# Altium PCB M8030-2.PcbDoc
Units mm, origin at the board's own origin, x right, y up, seen from the top; angles counter-clockwise.
Board outline 35.05 x 35.05 mm, 4 copper layers (Top Layer, GND, Signal, Bottom Layer), stack 0.778 mm thick; 49 components, 40 nets, 167 pads, 306 vias.
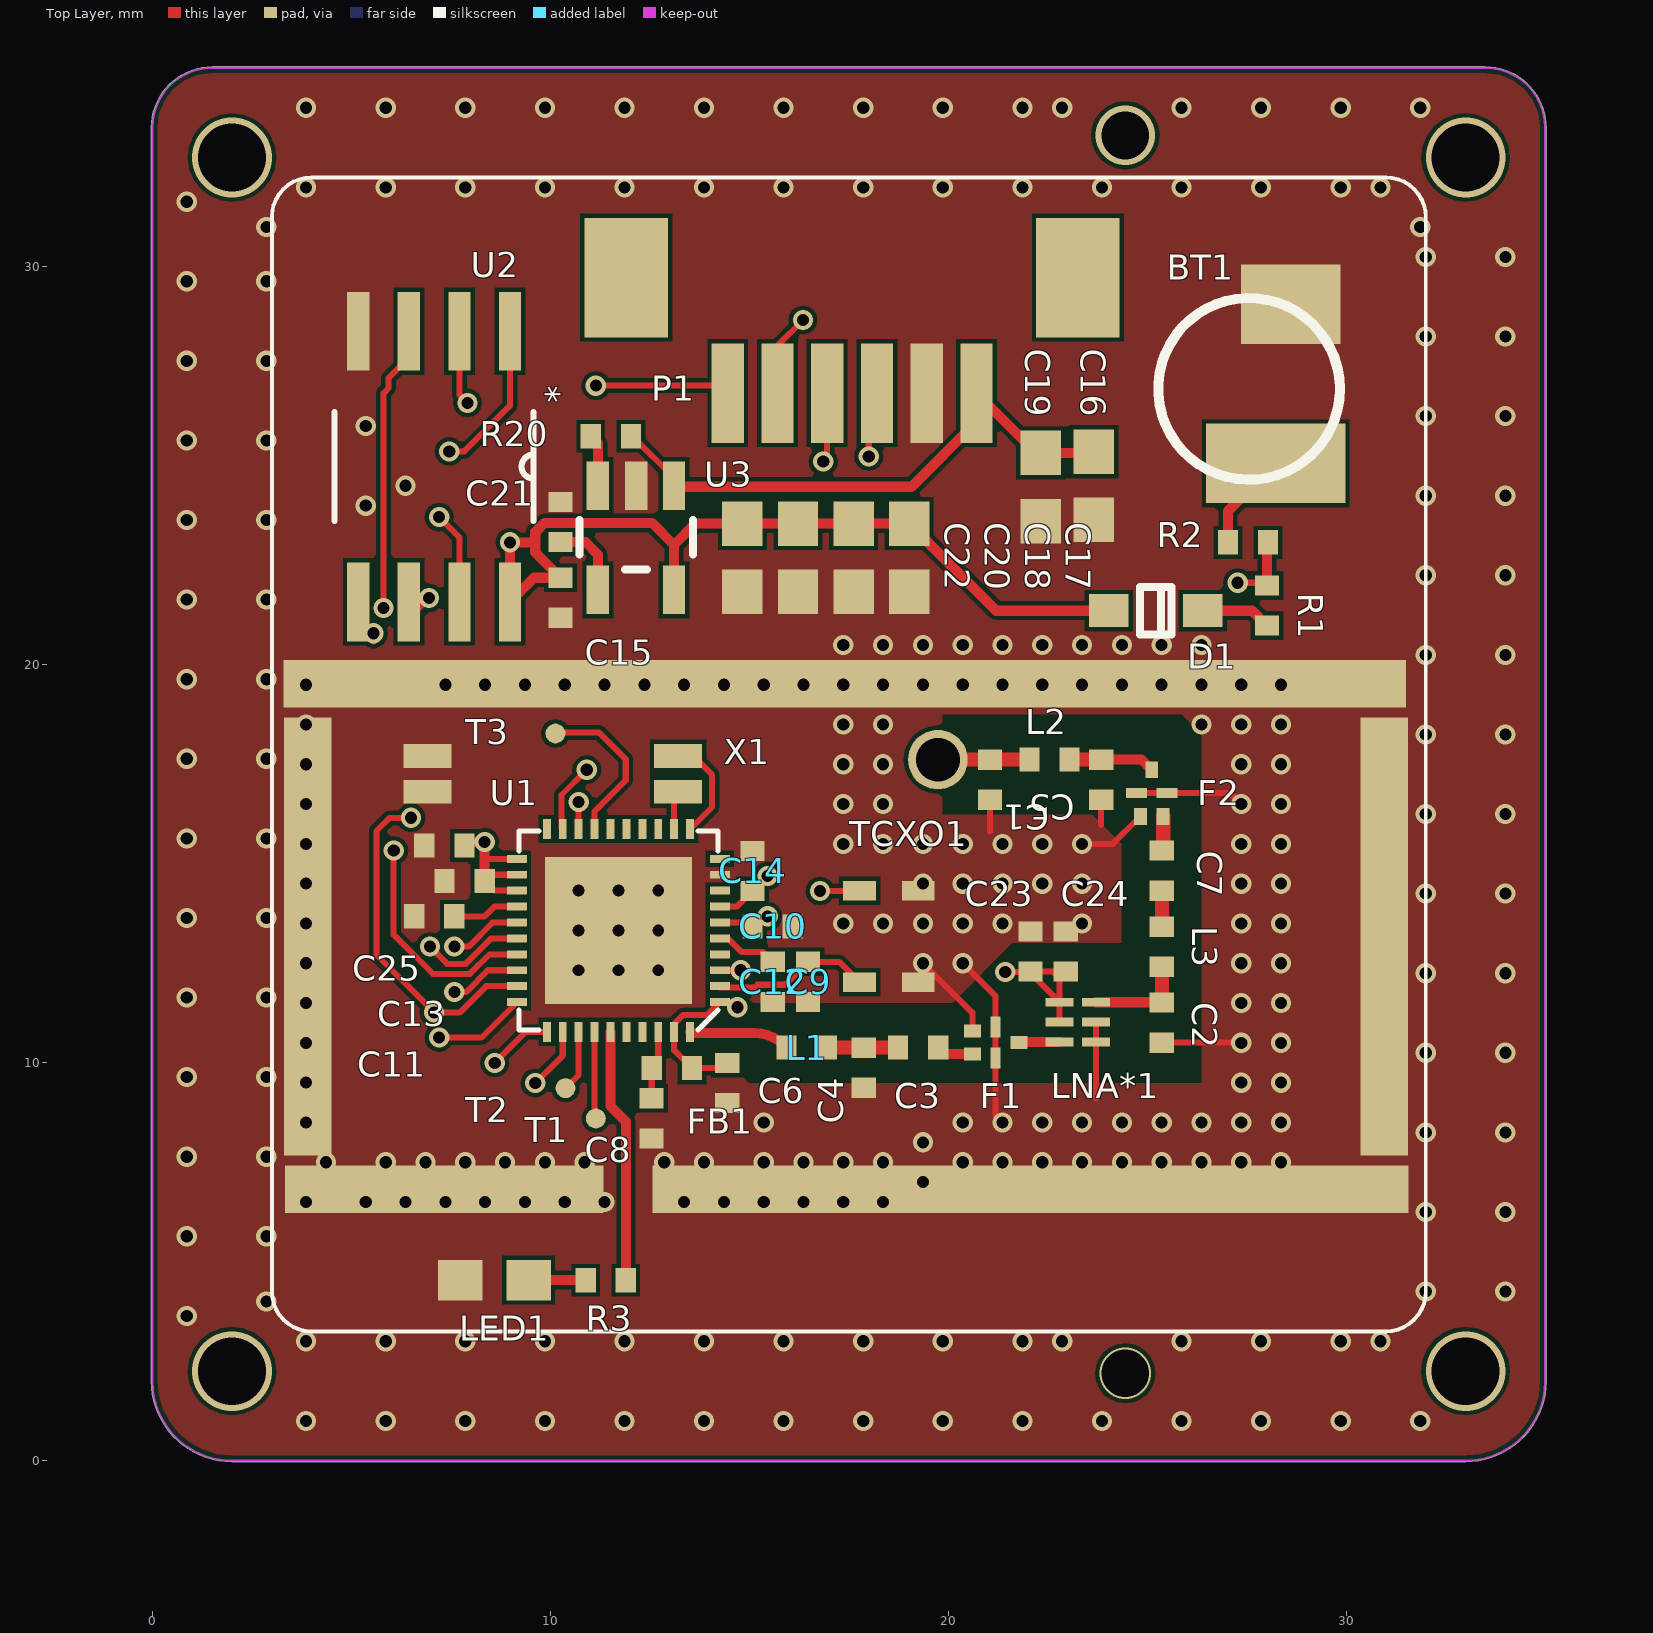
[diagram p0: Top Layer view]
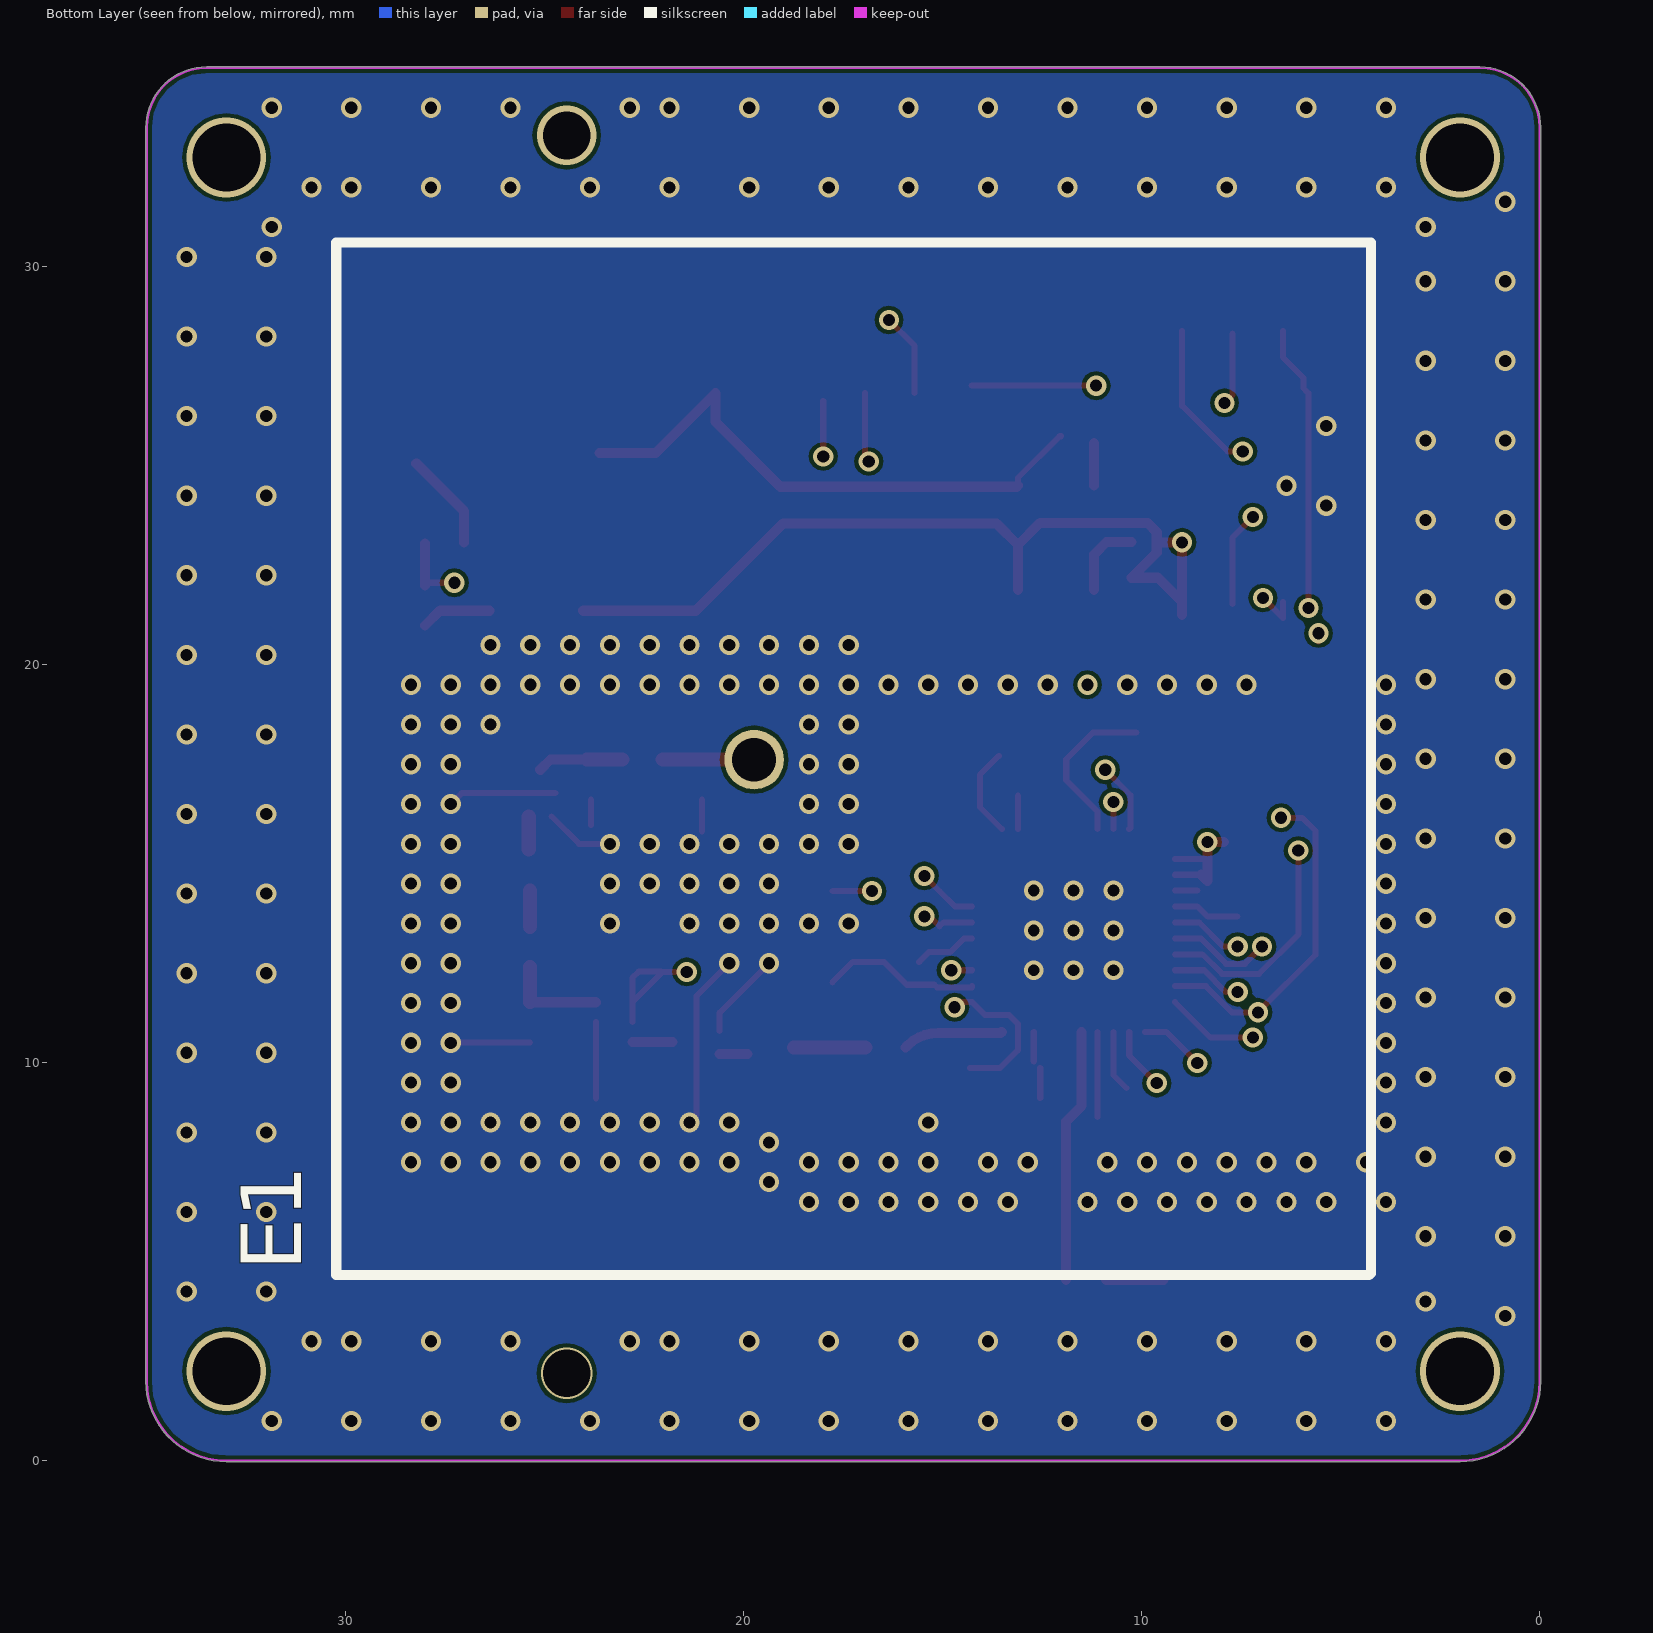
[diagram p1: Bottom Layer view, seen from below]
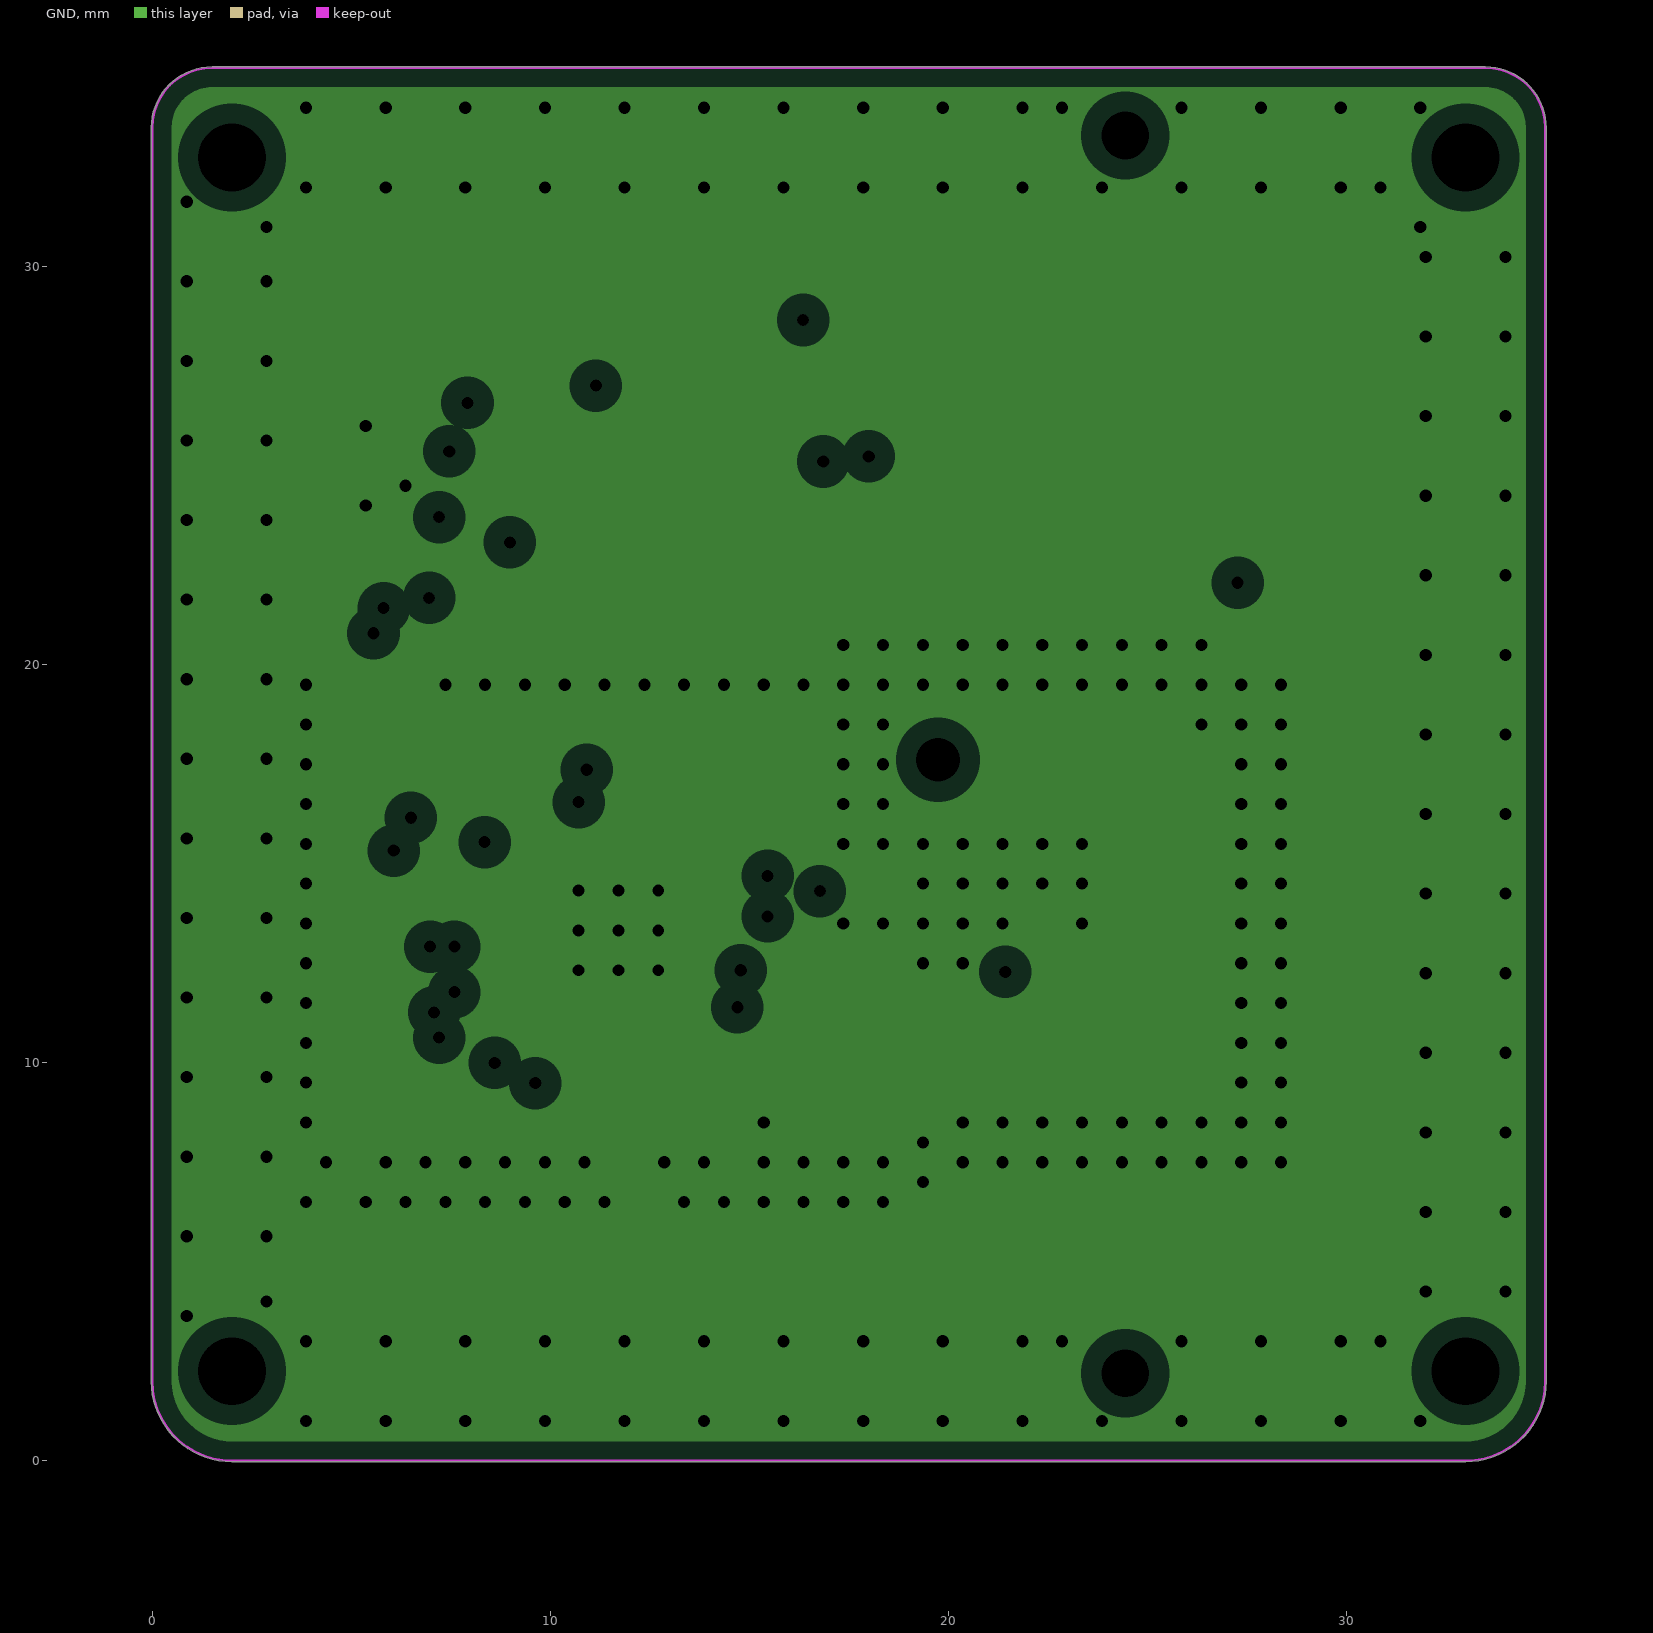
[diagram p2: GND, clearances drawn from the general rule]
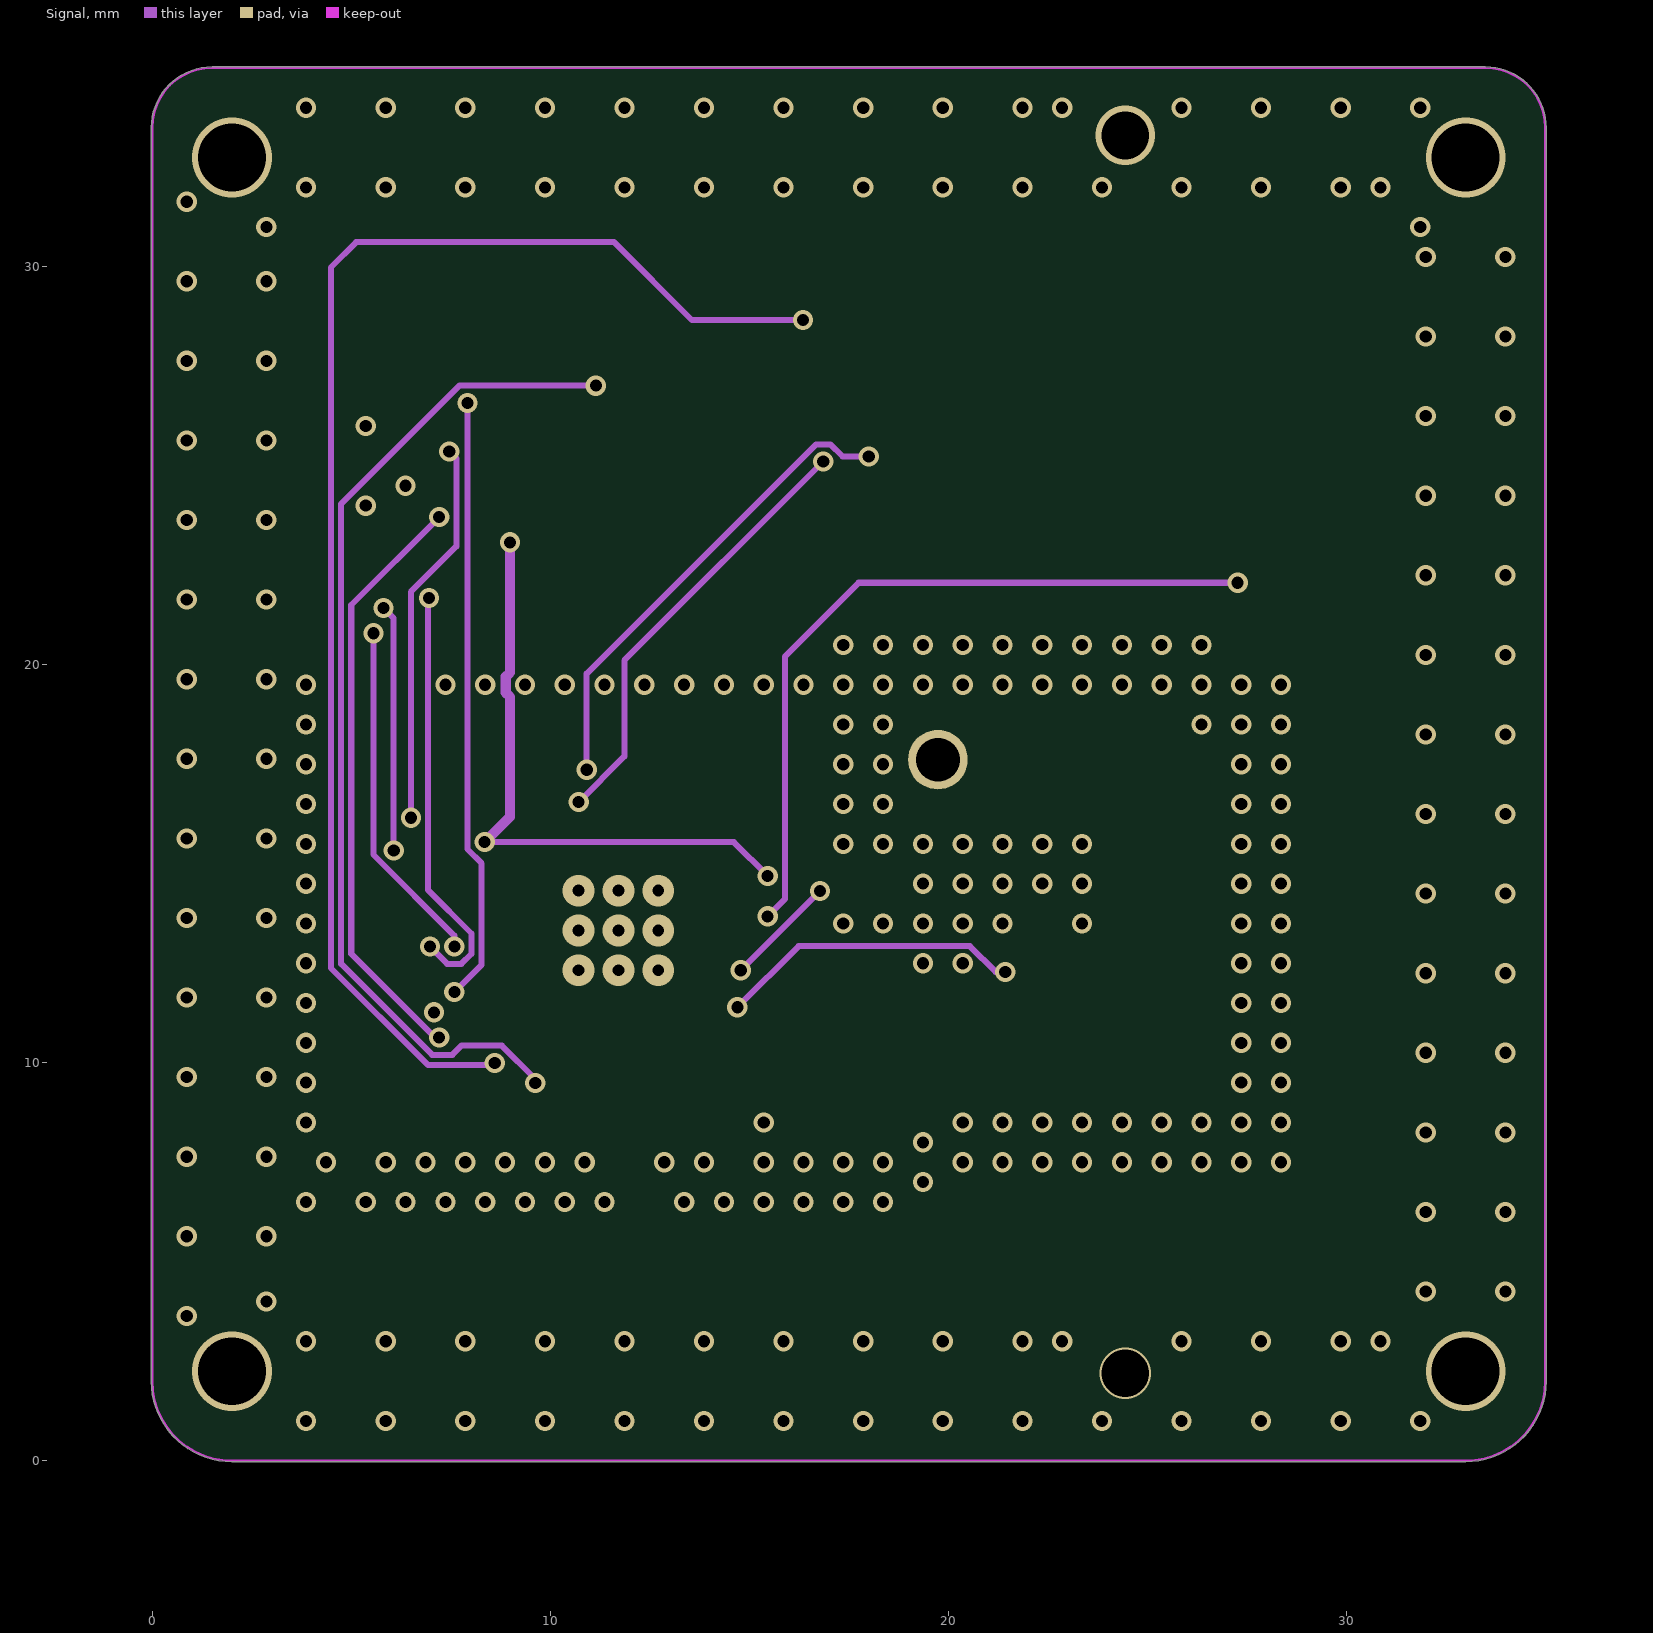
[diagram p3: Signal]

## Layer stack, top to bottom
Top Solder: solder mask 0.0102, Solder Resist, Dk 3.5
Top Layer: signal copper 0.0356
Dielectric 1: core 0.254, FR-4, Dk 4.2
GND: plane copper 0.036, net GND
Dielectric 3: prepreg 0.127, Dk 4.2
Signal: signal copper 0.036
Dielectric 2: core 0.254, Dk 4.2
Bottom Layer: signal copper 0.0356
Bottom Solder: solder mask 0.0102, Solder Resist, Dk 3.5

## Board outline
-0.025,2 -0.025,33.5 cw(c0,33.5) -0.025,33.5 cw(c1.5,33.5) 1.5,35.025 33.5,35.025 cw(c33.5,33.5) 35.025,33.5 cw(c35,33.5) 35.025,33.5 35.025,2 cw(c33,2) 33,-0.025 2,-0.025 cw(c2,2)

## Design rules (kind name [scope] priority, off if disabled: settings)
Clearance [All] p1: gap=0.102
MinimumSolderMaskSliver [All] p1 off: minsoldermaskwidth=0.254
PlaneClearance [All] p1: clearance=0.508
PlaneConnect [All] p1: planeconnectstyle=Direct reliefexpansion=0.508 reliefentries=4 reliefconductorwidth=0.254 reliefairgap=0.254
PolygonConnect [All] p1: connectstyle=Direct reliefconductorwidth=0.254 reliefentries=4 polygonreliefangle="90 Angle" airgapwidth=0.254
RoomDefinition M8030 [InComponentClass('M8030')] p1 off: confinementstyle=ConfineIn formatcopy=TRUE lockcomponents=FALSE outline 135.194,-9.746 141.29,-9.746 141.29,-1.11 135.194,-1.11
RoutingVias [All] p1: holewidth=0.305 width=0.508 viastyle="Through Hole" minholewidth=0.305 minwidth=0.508 maxholewidth=0.711 maxwidth=1.27
SilkToSilkClearance [All] p1 off: silktosilkclearance=0.254
SilkToSolderMaskClearance [IsPad] p1 off: minsilkscreentomaskgap=0.254 clearancetoexposedcopper=TRUE
SolderMaskExpansion [All] p1: expansion=0.102
UnpouredPolygon [All] p1: allowunpoured=FALSE
Width [All] p1: maxlimit=0.508 minlimit=0.102 preferedwidth=0.152
24 further rules are at their usual default settings.

## Components (designator, comment, footprint, x,y, rotation, side; value= is the part's Value field where it differs from the comment)
BT1 "Battery" XH414H-IV01E 27.56,26.935 r180 top
C1 "NC" 0402 21.05,17.109 r90 top
C2 "NC" 0402 25.368,11.013 r270 top
C3 "47pF" 0402 19.239,10.382 r0 top
C4 "2.7pF" 0402 17.875,9.87 r90 top
C5 "NC" 0402 23.844,17.109 r90 top
C6 "1uF" 0402 14.446,9.489 r90 top
C7 "470pF" 0402 25.368,14.823 r90 top
C8 "1uF" 0402 12.541,8.6 r90 top
C9 "1uF" 0402 16.478,12.029 r90 top
C10 "1uF" 0402 15.589,13.426 r180 top
C11 "1uF" 0402 7.08,13.68 r0 top
C12 "2.2uF" 0402 15.589,12.029 r90 top
C13 "4.7uF" 0402 7.842,14.569 r0 top
C14 "1uF" 0402 15.081,14.823 r270 top
C15 "1uF" 0402 10.255,21.681 r90 top
C16 "4.7uF" 0603 23.659,24.504 r270 top
C17 "4.7uF" 0603 19.018,22.697 r270 top
C18 "4.7uF" 0603 17.621,22.697 r270 top
C19 "0.1uF" 0603 22.32,24.475 r270 top
C20 "4.7uF" 0603 16.224,22.697 r270 top
C21 "0.1uf" 0402 10.255,23.586 r90 top
C22 "0.1uF" 0603 14.827,22.697 r270 top
C23 "33nF" 0402 22.066,12.791 r90 top
C24 "47pF" 0402 22.955,12.791 r90 top
C25 "4.7uF" 0402 7.334,15.458 r0 top
D1 "Diode" LC-SOD-323 25.216,21.36 r180 top
E1 "Antenna" "passive25x25 - 3D" 17.24,17.617 r90 bottom
F1 "SAW-SAFEB" SAFEB1G57KE0 21.779,10.509 r0 top
F2 "SAW-SAFEB" SAFEB1G57KE0 25.114,17.363 r90 top
FB1 "BLM15HD102SN1" 0402 13.049,9.87 r0 top
L1 "6.8nH" 0402 16.445,10.382 r180 top
L2 "0R" 0402 22.541,17.621 r0 top
L3 "6.8nH" 0402 25.368,12.918 r270 top
LED1 "LED0" 0603 8.604,4.536 r180 top
LNA*1 "MAX2659" MAX2659 23.717,11.521 r180 top
P1 "Usart Interface" WFRSM125 16.957,26.83 r180 top
R1 "" 0402 28.01,21.487 r90 top
R2 "" 0402 27.527,23.078 r0 top
R3 "" 0402 11.398,4.536 r180 top
R20 "10k" 0402 11.525,25.745 r180 top
T1 "TestPad" "TestPad - 0.5mm" 11.144,8.6 r270 top
T2 "TestPad" "TestPad - 0.5mm" 10.382,9.362 r0 top
T3 "TestPad" "TestPad - 0.5mm" 10.128,18.274 r0 top
TCXO1 "26M 0.5ppm" 2520_TCXO 18.51,13.172 r90 top
U1 "UBX-M8030-KT_1" UBX-M8030-KT 11.712,13.324 r180 top
U2 "SQI_FLash" SO8-208mil 7.08,24.983 r270 top
U3 "RT9193-33GB" SOT23-5 12.16,23.205 r180 top
X1 "32.768k, 6-12pF" MC-146 10.061,17.261 r180 top

## Footprints (in the part's own frame and the unit in brackets; to place one, negate y for a bottom-side part, rotate by r counter-clockwise, add the part's x,y. Pads: shape width x height; smd on the part's side, far side on the other; paste and mask are expansions set on the pad)
0402 [mil] "0402-RES"
  rect 20x24 smd: 1(-19.69,0) 2(20,0)
0603 [mil] "0603-RES"
  rect 44x40 smd: 1(-33.46,0) 2(34,0)
2520_TCXO [mm]
  rect 0.5x0.825 smd: 1(-1.15,-0.737) 2(1.15,-0.737) 3(1.15,0.737) 4(-1.15,0.737)
LC-SOD-323 [mm]
  rect 1x0.83 smd: 1(1.18,0) 2(-1.18,0)
  silkscreen extent -0.4,-0.6 0.4,0.6, body extent -1.35,-0.62 1.35,0.63, height 1.1
MAX2659 [mm]
  rect 0.7x0.22 smd: 1(0,1) 2(0,0.5) 3(0,0) 4(0.92,0) 5(0.92,0.5) 6(0.92,1)
  body extent -0.03,-0.23 0.97,1.22, height 0.72
MC-146 [mm]
  rect 1.2x0.6 smd: 1(-3.15,0.45) 2(3.15,0.45) 3(-3.15,-0.45) 4(3.15,-0.45)
"passive25x25 - 3D" [mm]
  round 1.5 hole 1.1: 1(0,2.5)
  silkscreen extent -12.95,-13 13,13, body extent -12.42,-12.55 12.68,12.55, height 2.5
SAFEB1G57KE0 [mm]
  rect 0.425x0.325 smd: 1(0,0) 3(-1.175,-0.288) 4(-1.175,0.288)
  rect 0.25x0.525 smd: 2(-0.587,-0.387) 5(-0.587,0.387)
  body extent -1.27,-0.56 0.08,0.53, height 0.6
SO8-208mil [mil]
  rect 78x22 smd: 1(-133.86,75) 2(-133.86,25) 3(-133.86,-25) 4(-133.86,-75) 5(133.86,-75) 6(133.86,-25) 7(133.86,25) 8(133.86,75)
  silkscreen extent -54,-99 54,99, body extent -118,-96 118,96, height 64
SOT23-5 [mil] "SOT23-5"
  rect 22x48 smd: 1(-37.4,-51.19) 2(0,-51.19) 3(38,-51.19) 4(38,52) 5(-37.4,52)
  silkscreen extent -56,-17 56,32
"TestPad - 0.5mm" [mm]
  round 0.5 smd: 1(0,0)
UBX-M8030-KT [mm]
  rect 3.7x3.7 smd: 0(0,0)
  rect 0.5x0.2 smd: 1(-2.55,1.8) 2(-2.55,1.4) 3(-2.55,1) 4(-2.55,0.6) 5(-2.55,0.2) 6(-2.55,-0.2) 7(-2.55,-0.6) 8(-2.55,-1) 9(-2.55,-1.4) 10(-2.55,-1.8) 21(2.55,-1.8) 22(2.55,-1.4) 23(2.55,-1) 24(2.55,-0.6) 25(2.55,-0.2) 26(2.55,0.2) 27(2.55,0.6) 28(2.55,1) 29(2.55,1.4) 30(2.55,1.8)
  rect 0.2x0.5 smd: 11(-1.8,-2.55) 12(-1.4,-2.55) 13(-1,-2.55) 14(-0.6,-2.55) 15(-0.2,-2.55) 16(0.2,-2.55) 17(0.6,-2.55) 18(1,-2.55) 19(1.4,-2.55) 20(1.8,-2.55) 31(1.8,2.55) 32(1.4,2.55) 33(1,2.55) 34(0.6,2.55) 35(0.2,2.55) 36(-0.2,2.55) 37(-0.6,2.55) 38(-1,2.55) 39(-1.4,2.55) 40(-1.8,2.55)
  silkscreen extent -2.5,-2.5 2.5,2.5, body extent -2.5,-2.5 2.5,2.5, height 1
WFRSM125 [mm]
  rect 0.81x2.5 smd: 1(-3.75,0) 2(-2.5,0) 3(-1.25,0) 4(0,0) 5(1.25,0) 6(2.5,0)
  rect 2.1x3 smd: shell(-6.3,-2.9) shell(5.05,-2.9)
  body extent -6.79,-3.82 5.46,0.38, height 3.4
XH414H-IV01E [mm]
  rect 3.5x2 smd: 1(-0.671,1.873)
  rect 2.5x2 smd: 2(-1.052,-2.127)
  silkscreen extent -2.28,-2.28 2.28,2.28, body extent -2.42,-2.4 2.36,2.4, height 2

## Part data
BT1: "Multicell Battery"
C1 C2 C3 C4 C5 C6 C7 C8 C9 C10 C11 C12 C13 C14 C15 C23 C24 C25: library part Cap, "Capacitor"
C16 C17 C18 C19 C20 C21 C22: library part CAP0402-CAP, "电容"
D1: "Default Diode"
E1: "Generic Antenna"
FB1 R1 R2 R3: library part Res2, "Resistor"
L1 L2 L3: library part Inductor, "Inductor"
LED1: "Typical INFRARED GaAs LED"
P1: library part "Header 6", "Header, 6-Pin"
R20: library part RESISTOR0402-RES, "电阻"
TCXO1: library part 7L26002009(2520TCXO)
U3: library part V_REG_LDOSMD, "<b>Voltage Regulator LDO</b> / Standard 150mA LDO voltage regulator in SOT-23 layout. Micrel part MIC5205. BP (by-pass) pin is used to lower output noise with 470pF cap."
X1: library part OSCILLATOR-3.2X2.5, "Crystal Oscillator in 3.2x2.5 SMD"

## Free pads (board coordinates)
  rect 19x1.2 smd: 0(22.066,6.822)
  rect 28.2x1.2 smd: 1(17.4,19.525)
  rect 1.2x11 smd: 2(30.956,13.172) 3(3.905,13.172)
  rect 8x1.2 smd: 4(7.334,6.822)

## Via types
v1: diameter 0.508, hole 0.305, Top Layer to Bottom Layer, tented both sides, 246 vias
v2: diameter 0.508, hole 0.305, Top Layer to Bottom Layer, 45 vias
v3: diameter 0.5/0.8/0.5 (per signal layer), hole 0.3, Top Layer to Bottom Layer, tented both sides, 9 vias
v4: diameter 2, hole 1.7, Top Layer to Bottom Layer, 4 vias
v5: diameter 1.5, hole 1.2, Top Layer to Bottom Layer, 1 vias
v6: diameter 1.3, hole 1.2, Top Layer to Bottom Layer, 1 vias

## Nets (pads, with @x,y where several pads share a name; then routed paths per layer and width w, separated by ;. In a path a pad name is that pad's centre, name@x,y a point inside that pad or via, vN(x,y) a via of type N, cw(c..) or ccw(c..) an arc to the next point about the centre after c; other vN are vias at no path point)
5V: C16.1 C19.1 P1.1 R20.1 U3.1 | length 14.3
  Top Layer w0.152: R20.1 12.061,25.745 13.11,24.696 U3.1
  Top Layer w0.254: U3.1 13.14,24.475 19.08,24.475 20.707,26.102 P1.1 22.212,25.325 C19.1 C16.1@23.63,25.325
GND: BT1.2 C1.1 C2.2 C4.1 C5.1 C6.1 C8.1 C9.1 C10.1 C11.1 C12.1 C13.1 C14.1 C15.1 C16.2 C17.2 C18.2 C19.2 C20.2 C21.2 C22.2 C23.2 C24.2 C25.1 F1.2 F1.4 F1.5 F2.2 F2.4 F2.5 LED1.2 LNA*1.1 LNA*1.2 P1.2 pad.0 pad.1 pad.2 pad.3 pad.4 TCXO1.1 TCXO1.2 U1.0 U1.9 U2.4 U3.2 X1.2 X1.4 | length 16.2
  Top Layer w0.152: v1(19.363,12.5) 20.604,11.259 F1.4 ; v1(20.363,12.5) 21.192,11.671 F1.5 F1.2 v1@21.192,8.671 ; 21.05,15.813 C1.1 ; v1(23.363,15.5) 24.139,15.5 F2.4 ; 23.717,9.104 LNA*1.1 LNA*1.2 ; 23.844,15.981 C5.1 ; F2.5 F2.2 27.088,16.775 v1(27.363,16.5) ; C2.2 v1@27.358,10.505
  other v1: 3.863,1 5.863,1 7.863,1 9.863,1 11.863,1 13.863,1 15.863,1 17.863,1 19.863,1 21.863,1 23.863,1 25.863,1 27.863,1 29.863,1 31.863,1 3.863,3 5.863,3 7.863,3 9.863,3 11.863,3 13.863,3 15.863,3 17.863,3 19.863,3 21.863,3 22.863,3 25.863,3 27.863,3 29.863,3 30.863,3 0.863,3.639 2.863,4 32,4.25 34,4.25 0.863,5.639 2.863,5.639 32,6.25 34,6.25 16.363,6.5 17.363,6.5 18.363,6.5 19.363,7 15.363,7.5 16.363,7.5 17.363,7.5 18.363,7.5 20.363,7.5 21.363,7.5 22.363,7.5 23.363,7.5 24.363,7.5 25.363,7.5 26.363,7.5 27.363,7.5 28.363,7.5 0.863,7.639 2.863,7.639 19.363,8 32,8.25 34,8.25 15.363,8.5 20.363,8.5 21.363,8.5 22.363,8.5 23.363,8.5 24.363,8.5 25.363,8.5 26.363,8.5 27.363,8.5 28.363,8.5 27.363,9.5 28.363,9.5 0.863,9.639 2.863,9.639 32,10.25 34,10.25 27.363,10.5 28.363,10.5 27.363,11.5 28.363,11.5 0.863,11.639 2.863,11.639 32,12.25 34,12.25 27.363,12.5 28.363,12.5 17.363,13.5 18.363,13.5 19.363,13.5 20.363,13.5 21.363,13.5 23.363,13.5 27.363,13.5 28.363,13.5 0.863,13.639 2.863,13.639 32,14.25 34,14.25 19.363,14.5 20.363,14.5 21.363,14.5 22.363,14.5 23.363,14.5 27.363,14.5 28.363,14.5 17.363,15.5 18.363,15.5 19.363,15.5 20.363,15.5 21.363,15.5 22.363,15.5 27.363,15.5 28.363,15.5 0.863,15.639 2.863,15.639 32,16.25 34,16.25 17.363,16.5 18.363,16.5 28.363,16.5 17.363,17.5 18.363,17.5 27.363,17.5 28.363,17.5 0.863,17.639 2.863,17.639 32,18.25 34,18.25 17.363,18.5 18.363,18.5 26.363,18.5 27.363,18.5 28.363,18.5 17.363,19.5 18.363,19.5 19.363,19.5 20.363,19.5 21.363,19.5 22.363,19.5 23.363,19.5 24.363,19.5 25.363,19.5 26.363,19.5 27.363,19.5 28.363,19.5 0.863,19.639 2.863,19.639 32,20.25 34,20.25 17.363,20.5 18.363,20.5 19.363,20.5 20.363,20.5 21.363,20.5 22.363,20.5 23.363,20.5 24.363,20.5 25.363,20.5 26.363,20.5 0.863,21.639 2.863,21.639 32,22.25 34,22.25 0.863,23.639 2.863,23.639 32,24.25 34,24.25 0.863,25.639 2.863,25.639 32,26.25 34,26.25 0.863,27.639 2.863,27.639 32,28.25 34,28.25 0.863,29.639 2.863,29.639 32,30.25 34,30.25 2.863,31 31.863,31 0.863,31.639 3.863,32 5.863,32 7.863,32 9.863,32 11.863,32 13.863,32 15.863,32 17.863,32 19.863,32 21.863,32 23.863,32 25.863,32 27.863,32 29.863,32 30.863,32 3.863,34 5.863,34 7.863,34 9.863,34 11.863,34 13.863,34 15.863,34 17.863,34 19.863,34 21.863,34 22.863,34 25.863,34 27.863,34 29.863,34 31.863,34
  other v2: 3.863,6.5 5.363,6.5 6.363,6.5 7.363,6.5 8.363,6.5 9.363,6.5 10.363,6.5 11.363,6.5 13.363,6.5 14.363,6.5 15.363,6.5 4.363,7.5 5.863,7.5 6.863,7.5 7.863,7.5 8.863,7.5 9.863,7.5 10.863,7.5 12.863,7.5 13.863,7.5 3.863,8.5 3.863,9.5 3.863,10.5 3.863,11.5 3.863,12.5 3.863,13.5 3.863,14.5 3.863,15.5 3.863,16.5 3.863,17.5 3.863,18.5 3.863,19.5 7.363,19.5 8.363,19.5 9.363,19.5 10.363,19.5 11.363,19.5 12.363,19.5 13.363,19.5 14.363,19.5 15.363,19.5 16.363,19.5 5.363,24 6.363,24.5 5.363,26
  other v3: 10.712,12.324 11.712,12.324 12.712,12.324 10.712,13.324 11.712,13.324 12.712,13.324 10.712,14.324 11.712,14.324 12.712,14.324
LED: R3.1 U1.35 | length 6.4
  Top Layer w0.254: U1.35 11.512,8.909 11.898,8.523 R3.1
NetBT1_1: BT1.1 R2.1 | length 2.5
  Top Layer w0.254: R2.1 27.027,23.858 BT1.1
NetC1_2: C1.2 E1.1 L2.1 | length 2.3
  Top Layer w0.356: E1.1@19.744,17.621 21.144,17.621 L2.1
NetC2_1: C2.1 L3.2 LNA*1.3 | length 2.5
  Top Layer w0.254: LNA*1.3 25.36,11.521 C2.1
  Top Layer w0.356: C2.1@25.368,11.529 L3.2
NetC3_1: C3.1 C4.2 L1.1 | length 1.8
  Top Layer w0.356: L1.1 C3.1
NetC3_2: C3.2 F1.3 | length 0.7
  Top Layer w0.254: C3.2@19.908,10.221 F1.3
NetC5_2: C5.2 F2.1 L2.2 | length 2.2
  Top Layer w0.254: C5.2@23.938,17.621 24.856,17.621 F2.1
  Top Layer w0.356: L2.2 C5.2@23.938,17.621
NetC7_1: C7.1 L3.1 | length 0.9
  Top Layer w0.356: L3.1 C7.1
NetC7_2: C7.2 F2.3 | length 0.8
  Top Layer w0.356: C7.2@25.402,15.364 F2.3
NetC8_2: C8.2 FB1.1 U1.38 | length 1.5
  Top Layer w0.152: C8.2@12.549,9.116 FB1.1 ; FB1.1@12.712,10.033 U1.38
NetC9_2: C9.2 TCXO1.4 U1.2 | length 4
  Top Layer w0.152: U1.2 14.262,11.893 15.142,11.893 15.211,11.961 15.902,11.961 C9.2 17.258,12.537 TCXO1.4
NetC10_2: C10.2 R1.2 R2.2 U1.6 | length 22.1
  Top Layer w0.152: U1.6 14.983,13.524 C10.2 15.414,13.759 15.462,13.712 v1(15.462,13.68) ; v1(27.273,22.062) 27.943,22.062 R1.2
  Top Layer w0.254: R1.2 R2.2@28.01,23.053
  Signal w0.152: v1(15.462,13.68) 15.894,14.112 15.894,20.208 17.748,22.062 v1(27.273,22.062)
NetC11_2: C11.2 U1.24 | length 1.7
  Top Layer w0.152: C11.2 8.35,13.68 8.594,13.924 U1.24
NetC12_2: C12.2 U1.5 | length 1.6
  Top Layer w0.152: U1.5 14.464,13.124 14.81,12.778 15.348,12.778 C12.2
NetC21_1: C21.1 U3.4 | length 2
  Top Layer w0.254: C21.1 10.882,23.086 11.195,22.773 U3.4
NetD1_2: D1.2 R1.1 | length 1.8
  Top Layer w0.254: D1.2 27.637,21.36 R1.1
NetF1_1: F1.1 LNA*1.6 | length 1
  Top Layer w0.254: F1.1@21.792,10.521 LNA*1.6
NetL1_2: L1.2 U1.40 | length 2.5
  Top Layer w0.254: U1.40 ccw(c13.571,10.833) 13.571,10.75 15.113,10.75 cw(c15.113,9.649) 15.891,10.428 L1.2
NetLED1_1: LED1.1 R3.2 | length 1.4
  Top Layer w0.254: LED1.1 R3.2
NetP1_3: P1.3 U1.19 | length 15.2
  Top Layer w0.152: U1.19 10.28,15.906 10.28,16.729 v1(10.914,17.363) ; v1(18.002,25.237) P1.3@18.002,26.625
  Signal w0.152: v1(10.914,17.363) 10.914,19.776 16.68,25.542 17.038,25.542 17.343,25.237 v1(18.002,25.237)
NetP1_4: P1.4 U1.18 | length 13.7
  Top Layer w0.152: U1.18 v1(10.712,16.55) ; v1(16.859,25.11) 16.957,25.012 P1.4
  Signal w0.152: v1(10.712,16.55) 11.863,17.701 11.863,20.114 v1(16.859,25.11)
NetP1_5: P1.5 U1.31 | length 39.4
  Top Layer w0.152: v1(8.604,9.997) 9.381,10.774 U1.31 ; P1.5 15.707,28.022 v1(16.351,28.666)
  Signal w0.152: v1(8.604,9.997) 8.553,9.946 6.923,9.946 4.489,12.38 4.489,29.988 5.123,30.622 11.601,30.622 13.557,28.666 v1(16.351,28.666)
NetP1_6: P1.6 U1.32 | length 30.3
  Top Layer w0.152: v1(9.62,9.489) 10.312,10.181 U1.32 ; v1(11.144,27.015) P1.6@14.272,27.015
  Signal w0.152: v1(9.62,9.489) 9.62,9.592 8.783,10.429 7.766,10.429 7.537,10.2 7.028,10.2 4.743,12.485 4.743,24.043 7.715,27.015 v1(11.144,27.015)
NetR20_2: R20.2 U3.3 | length 1.1
  Top Layer w0.254: U3.3 R20.2@11.195,25.567
NetT1_1: T1.1 U1.34 | length 2.1
  Top Layer w0.152: T1.1@11.112,8.632 U1.34
NetT2_1: T2.1 U1.33 | length 1.5
  Top Layer w0.152: T2.1 10.712,9.692 U1.33
NetT3_1: T3.1 U1.17 | length 4.1
  Top Layer w0.152: T3.1@10.128,18.302 11.221,18.302 11.896,17.627 11.896,17.099 11.112,16.315 U1.17
NetTCXO1_3: TCXO1.3 U1.3 | length 4.3
  Top Layer w0.152: U1.3 v1(14.786,12.324) ; v1(16.776,14.315) TCXO1.3@17.766,14.315
  Signal w0.152: v1(14.786,12.324) v1(16.776,14.315)
NetU1_11: U1.11 X1.3 | length 2.3
  Top Layer w0.152: U1.11 14.065,16.427 14.065,17.236 X1.3@13.59,17.711
NetU1_12: U1.12 X1.1 | length 0.8
  Top Layer w0.152: U1.12 X1.1@13.112,16.712
SQI_CLK: U1.26 U2.6 | length 14.5
  Top Layer w0.152: U2.6 6.445,21.173 v1(6.953,21.681) ; v1(6.977,12.918) 7.409,12.486 7.875,12.486 8.513,13.124 U1.26
  Signal w0.152: v1(6.953,21.681) 6.931,21.659 6.931,14.337 8.02,13.248 8.02,12.739 7.767,12.486 7.409,12.486 v1(6.977,12.918)
SQI_CS: U1.29 U2.1 | length 22.1
  Top Layer w0.152: v1(6.496,16.156) 5.961,16.156 5.632,15.827 5.632,12.715 v1(7.08,11.267) 7.733,11.267 8.39,11.924 U1.29 ; v1(7.461,25.364) 7.842,25.364 8.985,26.507 U2.1
  Signal w0.152: v1(6.496,16.156) 6.496,21.834 7.639,22.977 7.639,25.186 v1(7.461,25.364)
SQI_D0: U1.25 U2.5 | length 10.7
  Top Layer w0.152: v1@5.556,20.586 v1(5.556,20.792) ; v1(7.588,12.918) 7.947,12.918 8.554,13.524 U1.25
  Signal w0.152: v1(5.556,20.792) 5.556,15.228 7.588,13.196 v1(7.588,12.918)
SQI_D1: U1.28 U2.2 | length 19
  Top Layer w0.152: v1(7.588,11.775) 7.882,11.775 8.431,12.324 U1.28 ; U2.2@7.715,28.325 7.715,26.786 v1(7.918,26.583)
  Signal w0.152: v1@7.461,11.902 v1(7.588,11.775) 8.274,12.461 8.274,15.011 7.918,15.367 v1(7.918,26.583)
SQI_D2: U1.27 U2.3 | length 19.2
  Top Layer w0.152: v1(5.81,21.427) 5.81,26.83 5.937,26.957 5.937,27.211 6.445,27.719 U2.3 ; v1(6.064,15.331) 6.064,13.221 7.052,12.232 7.98,12.232 8.472,12.724 U1.27
  Signal w0.152: v1(5.81,21.427) 6.064,21.173 v1(6.064,15.331)
SQI_D3: U1.30 U2.7 | length 19.7
  Top Layer w0.152: v1(7.207,10.632) 8.27,10.632 U1.30 ; v1(7.207,23.713) 7.715,23.205 U2.7@7.715,21.525
  Signal w0.152: v1(7.207,10.632) 7.104,10.632 4.997,12.739 4.997,21.503 v1(7.207,23.713)
VCC: C13.2 C14.2 C15.2 C17.1 C18.1 C20.1 C22.1 C25.2 D1.1 U1.7 U1.21 U1.22 U1.23 U2.8 U3.5 | length 42.9
  Top Layer w0.152: 8.397,15.124 U1.21 ; C13.2@8.505,14.724 U1.22 ; C13.2@8.595,14.324 U1.23 ; U1.7 14.69,13.924 C14.2 v1(15.462,14.696)
  Top Layer w0.254: C25.2@7.93,15.546 v1(8.35,15.546) C13.2 C13.2@8.505,14.724 ; U2.8@8.985,21.26 U2.8 ; 9.619,23.078 v1(8.985,23.078) U2.8 ; U3.5 13.11,23.012 ; D1.1 21.205,21.36 C17.1 C18.1 C20.1 C22.1 13.645,23.547 13.11,23.012 ; U2.8 9.591,22.189 C15.2 9.62,22.824 9.62,23.333 9.856,23.569 12.553,23.569 13.11,23.012
  Signal w0.152: v1(8.35,15.546) 14.612,15.546 v1(15.462,14.696)
  Signal w0.254: v1(8.35,15.546) 8.985,16.181 8.985,19.195 8.88,19.3 8.88,19.7 8.985,19.805 v1(8.985,23.078)
VCC_RF: C6.2 C23.1 C24.1 FB1.2 LNA*1.4 LNA*1.5 U1.1 U1.39 | length 15.2
  Top Layer w0.152: C6.2@14.319,9.87 FB1.2 13.112,10.315 U1.39 13.112,10.976 13.339,11.202 13.94,11.202 U1.1 14.697,11.524 14.7,11.521 v1(14.7,11.394) ; v1(21.431,12.283) 22.035,12.283 LNA*1.4 ; C23.1 22.639,12.291 22.797,12.133 LNA*1.4 ; LNA*1.5 LNA*1.4
  Signal w0.152: v1(14.7,11.394) 16.238,12.932 20.542,12.932 21.191,12.283 v1(21.431,12.283)
pads on no net: P1.shell U1.4 U1.8 U1.10 U1.13 U1.14 U1.15 U1.16 U1.20 U1.36 U1.37
copper on no net:
  other v4: 2,2.25 33,2.25 2,32.75 33,32.75
  other v5: 24.45,33.305
  other v6: 24.45,2.195

## Polygon pours and split planes (outlines as drawn)
GND on Top Layer "Top Layer-No Net" (solid, remove dead copper, pour order 4): -0.794,35.397 36.163,35.397 36.29,35.524 35.909,35.143 35.909,-1.306 0.349,-1.306 -1.175,0.218
GND on Bottom Layer "Top Layer-No Net" (solid, remove dead copper, pour order 3): 35.863,35.5 -1.137,35.5 -1.137,-2 -0.137,-1 35.363,-1
GND on GND (split plane): 34.516,33.507 34.515,33.5 34.516,33.507
GND on GND (split plane): 33.633,34.508 33.763,34.482 33.889,34.44 34.009,34.381 34.119,34.307 34.219,34.219 34.307,34.119 34.381,34.009 34.44,33.889 34.482,33.763 34.508,33.633 34.516,33.513 34.516,33.507 34.478,33.507 34.475,33.5 34.515,33.5 34.515,2 34.516,1.985 34.508,1.83 34.479,1.662 34.432,1.499 34.367,1.342 34.285,1.193 34.186,1.054 34.073,0.927 33.946,0.814 33.807,0.715 33.658,0.633 33.501,0.568 33.338,0.521 33.17,0.492 33.015,0.484 33,0.485 2,0.485 1.985,0.484 1.83,0.492 1.662,0.521 1.499,0.568 1.342,0.633 1.193,0.715 1.054,0.814 0.927,0.927 0.814,1.054 0.715,1.193 0.633,1.342 0.568,1.499 0.521,1.662 0.492,1.83 0.484,1.985 0.485,2 0.485,33.493 0.522,33.493 0.525,33.5 0.485,33.5 0.484,33.513 0.492,33.633 0.518,33.763 0.56,33.889 0.619,34.009 0.693,34.119 0.781,34.219 0.881,34.307 0.991,34.381 1.111,34.44 1.237,34.482 1.367,34.508 1.487,34.516 1.5,34.515 33.5,34.515 33.513,34.516

## Keep-outs
Keep-Out Layer:
  lines w0.05: 0,2 ccw(c2,2) 2,0 33,0 ccw(c33,2) 35,2 35,33.5 ccw(c33.5,33.5) 33.5,35 1.5,35 ccw(c1.5,33.5) 0,33.5 0,2

## Other copper
Top Layer:
  pour cut-out: 19.863,18.75 25.863,18.75 26.363,18.25 26.363,9.5 14.994,9.5 14.053,10.44 15.113,11.5 20.113,11.5 21.613,13 24.363,13 24.363,15.5 23.613,16.25 19.863,16.25

## Silkscreen, mask and mechanical layers (free items; w line width, h text height)
Top Overlay:
  lines w0.1: 3,4.25 ccw(c4,4.25) 4,3.25 31,3.25 ccw(c31,4.25) 32,4.25 32,31.25 ccw(c31,31.25) 31,32.25 4,32.25 ccw(c4,31.25) 3,31.25 3,4.25
Bottom Solder:
  rectangle: 27.363,27.5 29.863,30
  rectangle: 23.363,24.5 25.863,27
  rectangle: 19.363,27.5 21.863,30
  rectangle: 15.363,21.5 17.863,24
  rectangle: 12.363,25.5 14.863,28
  rectangle: 8.363,27.5 10.863,30
  rectangle: 4.363,26.5 6.863,29
  rectangle: 19.363,23.5 21.863,26
  rectangle: 23.363,28.5 25.863,31
  rectangle: 27.363,22.5 29.863,25
  rectangle: 23.363,20.5 25.863,23
  rectangle: 10.363,21.5 12.863,24
  rectangle: 16.363,25.5 18.863,28
  rectangle: 7.363,18.5 9.863,21
  rectangle: 3.363,22.5 5.863,25
  rectangle: 3.363,16.5 5.863,19
  rectangle: 12.363,17.5 14.863,20
  rectangle: 23.363,15.5 25.863,18
  rectangle: 19.363,19.5 21.863,22
  rectangle: 27.363,17.5 29.863,20
  rectangle: 27.363,11.5 29.863,14
  rectangle: 20.363,11.5 22.863,14
  rectangle: 15.363,12.5 17.863,15
  rectangle: 10.363,13.5 12.863,16
  rectangle: 10.363,11.5 12.863,14
  rectangle: 8.363,12.5 10.863,15
  rectangle: 12.363,12.5 14.863,15
  rectangle: 23.363,8.5 25.863,11
  rectangle: 17.363,8.5 19.863,11
  rectangle: 11.363,7.5 13.863,10
  rectangle: 6.363,6.5 8.863,9
  rectangle: 3.363,11.5 5.863,14
  rectangle: 3.363,7.5 5.863,10
  rectangle: 27.363,6.5 29.863,9
  rectangle: 23.363,3.5 25.863,6
  rectangle: 20.363,5.5 22.863,8
  rectangle: 14.363,5.5 16.863,8
  rectangle: 17.363,3.5 19.863,6
  rectangle: 11.363,3.5 13.863,6
  rectangle: 3.363,3.5 5.863,6
  rectangle: 7.363,3.5 9.863,6
  rectangle: 15.863,29.5 18.363,32
  rectangle: 11.363,29.5 13.863,32
Mechanical 9:
  circle w0.025: c33,0 r0.012

## Text inside footprints (layer, text, board x,y; h text height)
U2: Top Overlay "*" at 9.62,27.015 h0.64 r270